# Altium PCB Ravage.PcbDoc
Units mm, origin at the board's own origin, x right, y up, seen from the top; angles counter-clockwise.
Board outline 99.5 x 79.8 mm, 4 copper layers (Top Layer, Internal Plane 1, Internal Plane 2, Bottom Layer); 1 components, 0 nets, 50 pads, 0 vias.
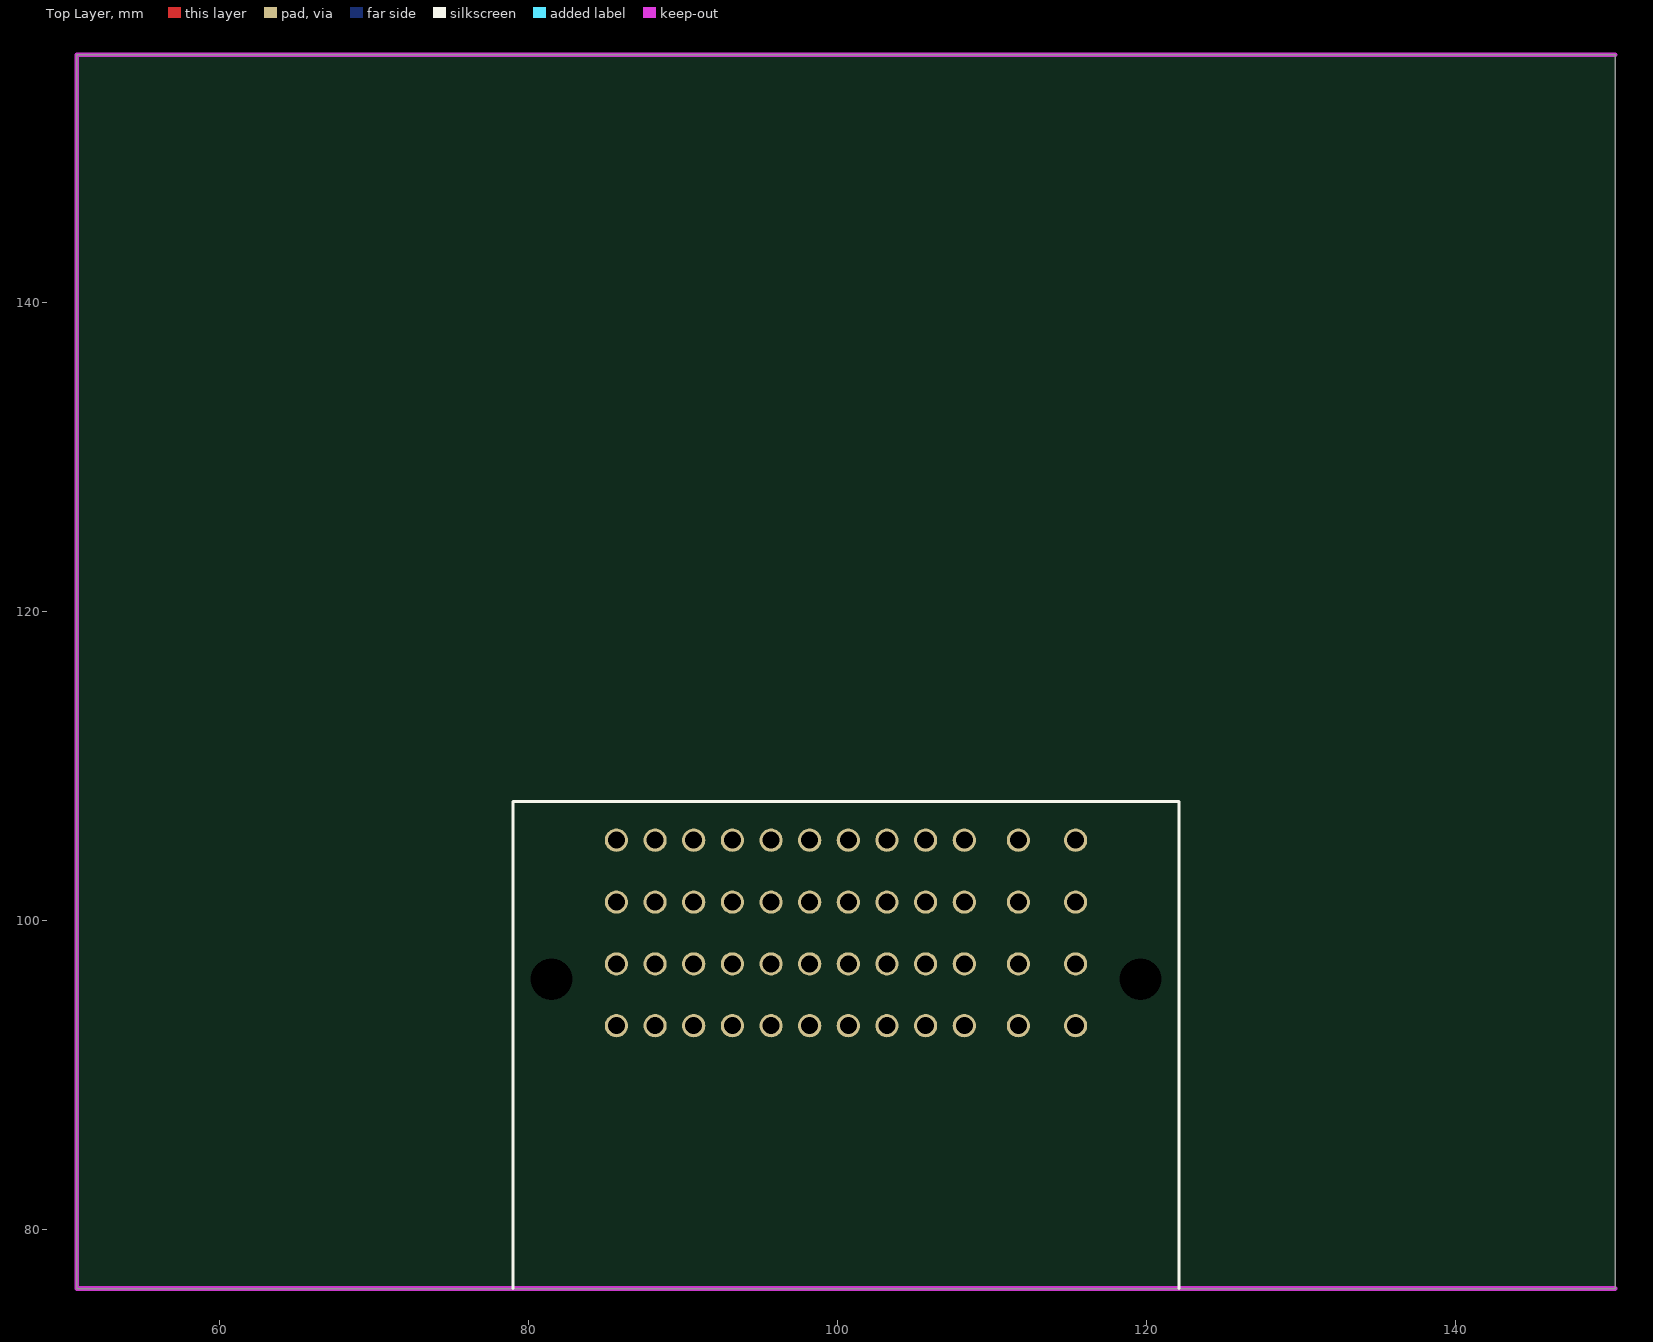
[diagram p0: Top Layer view]
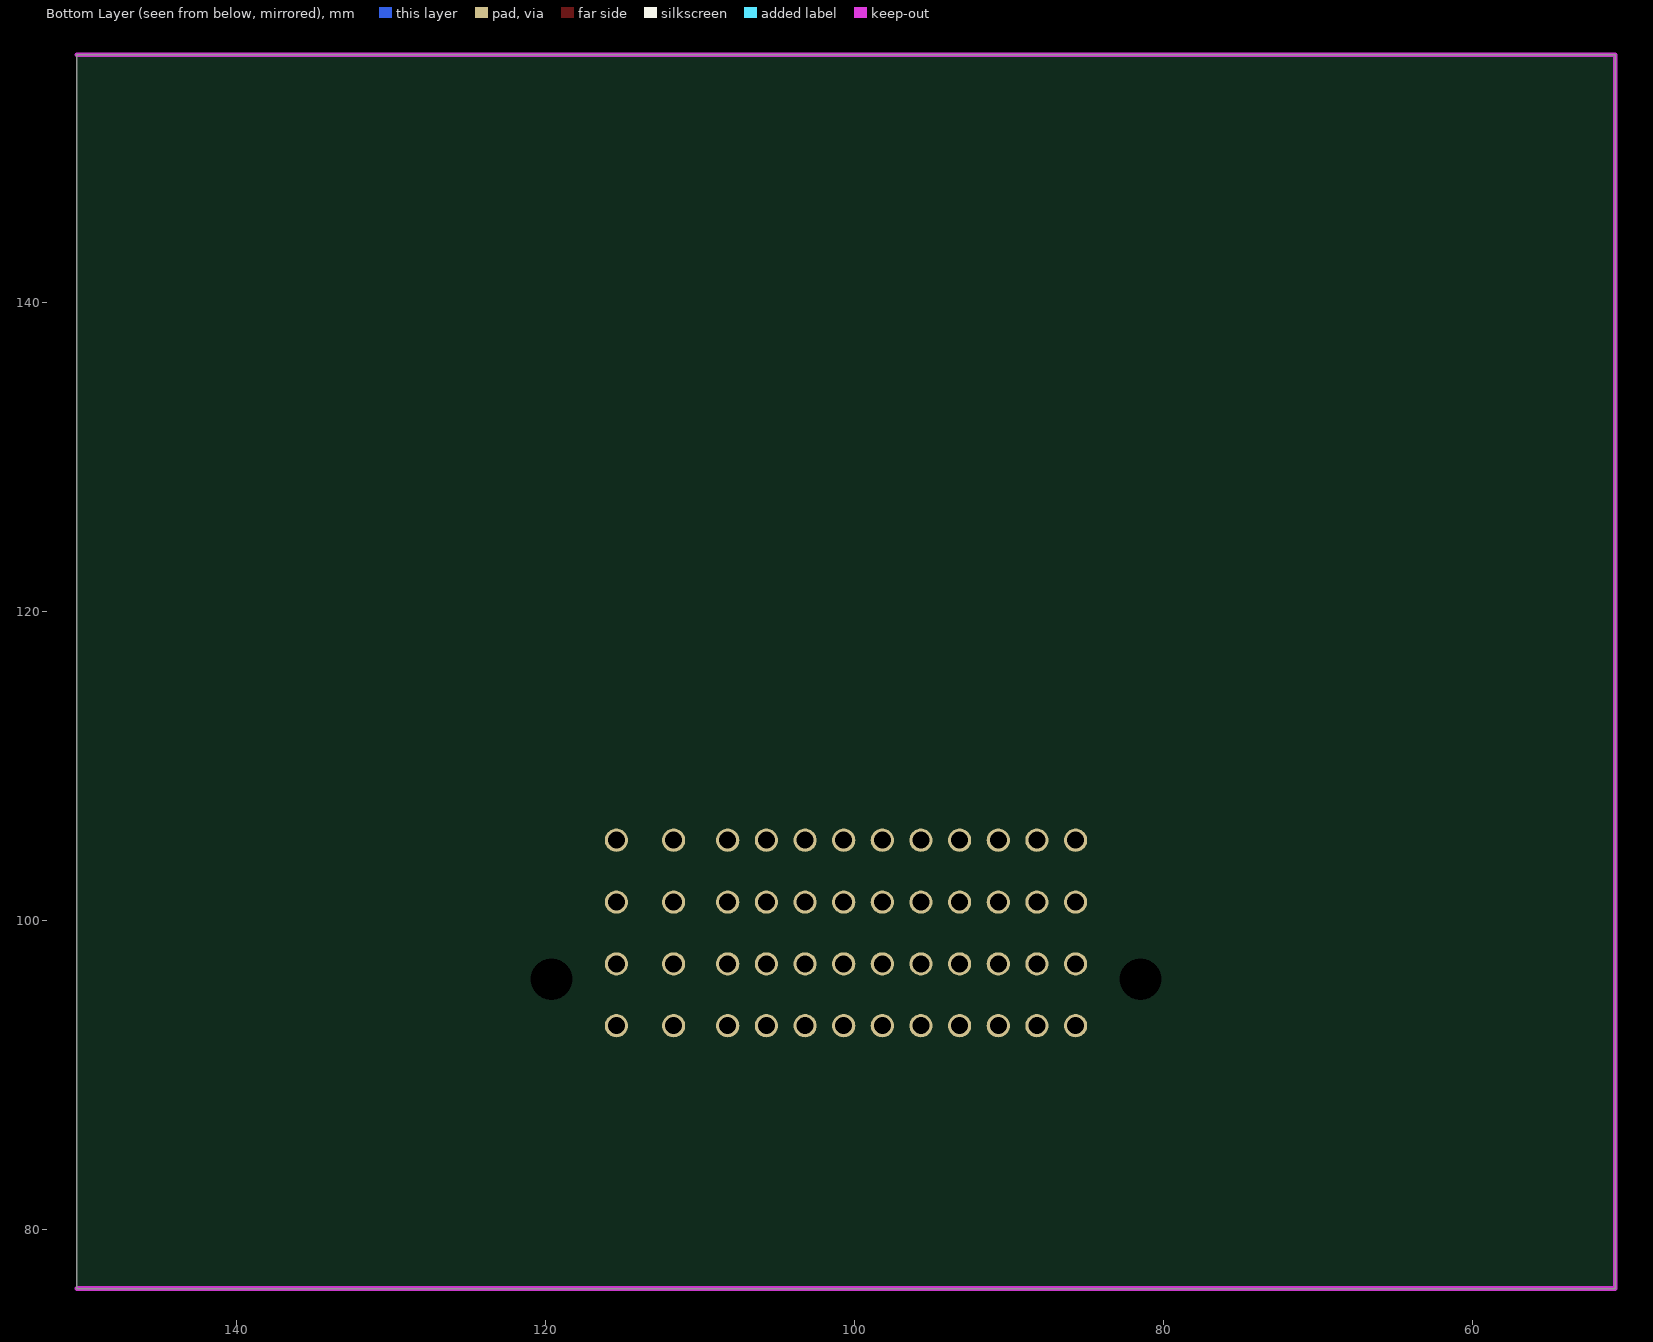
[diagram p1: Bottom Layer view, seen from below]
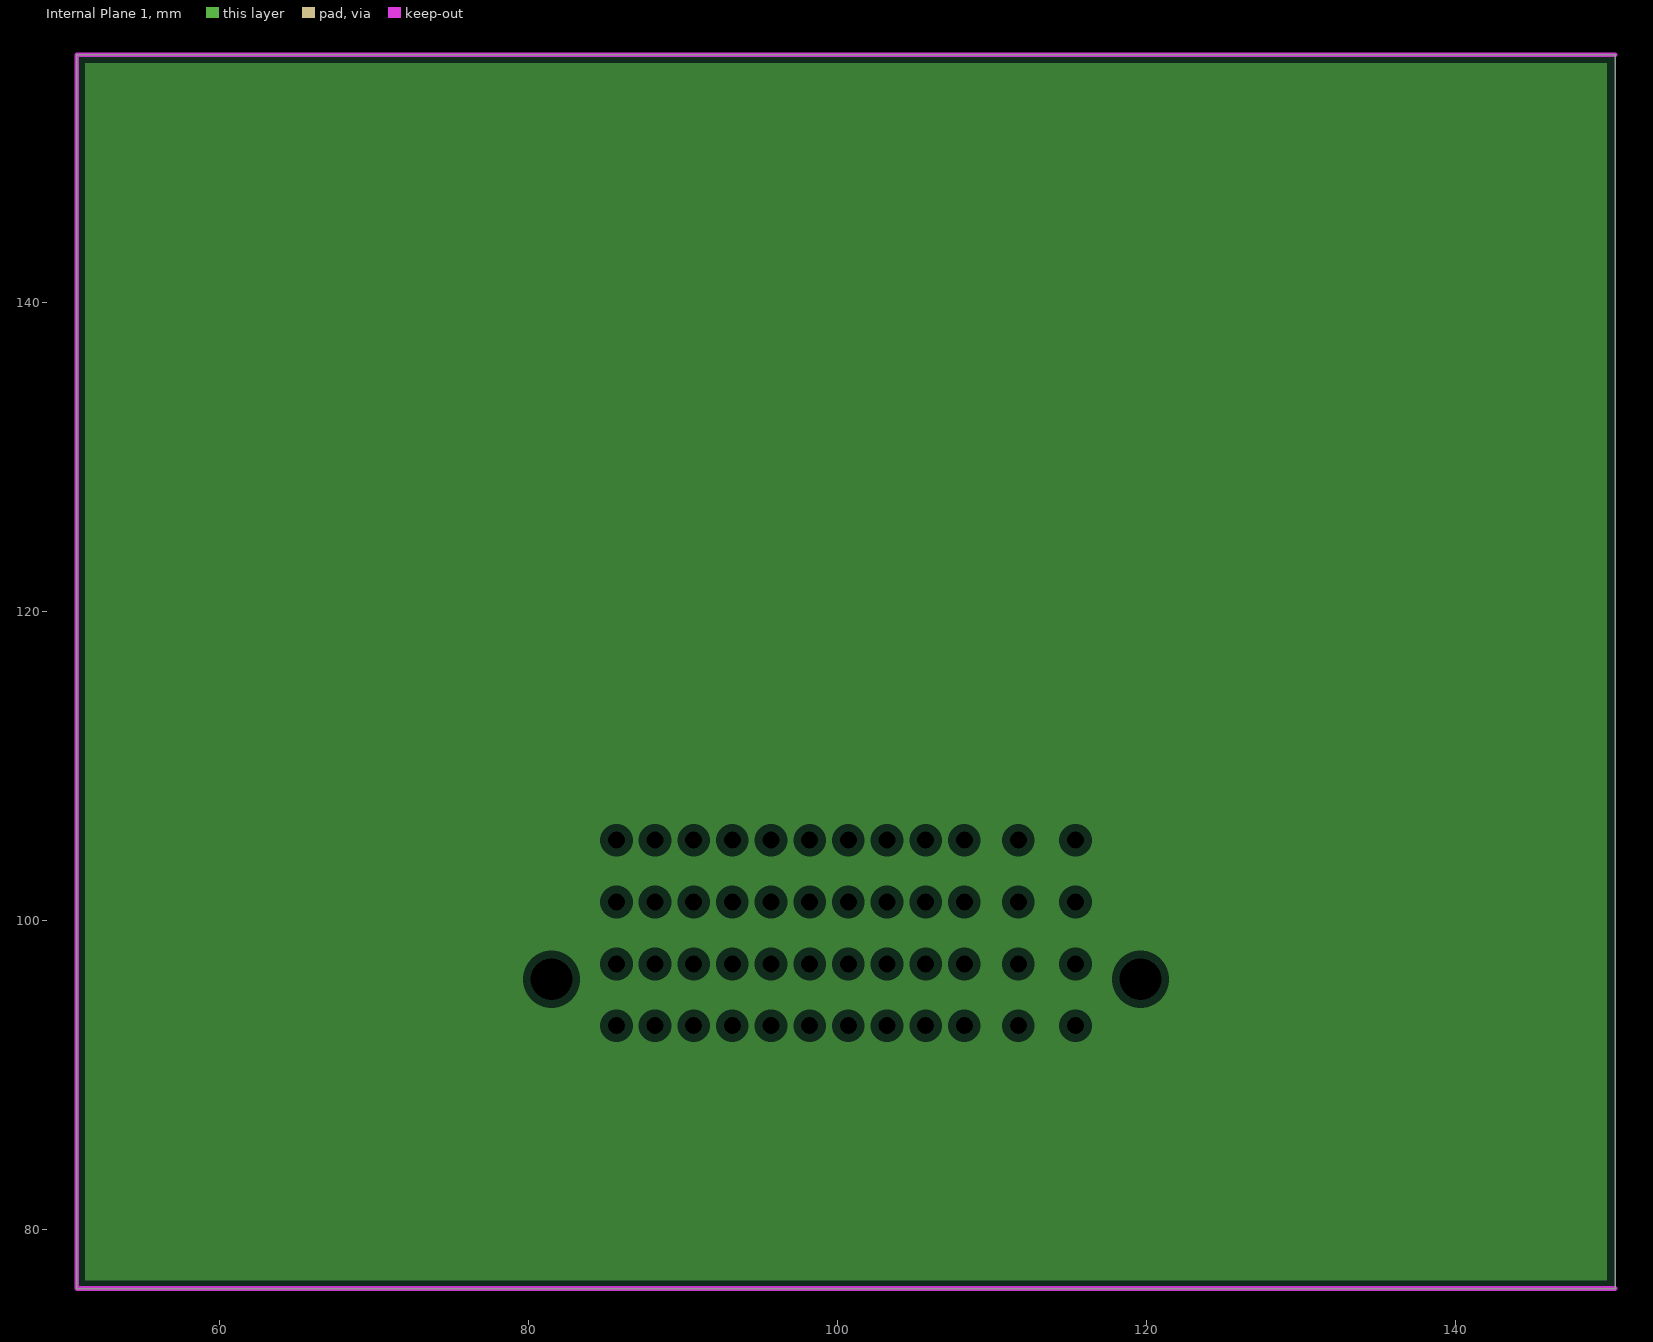
[diagram p2: Internal Plane 1, clearances drawn from the general rule]
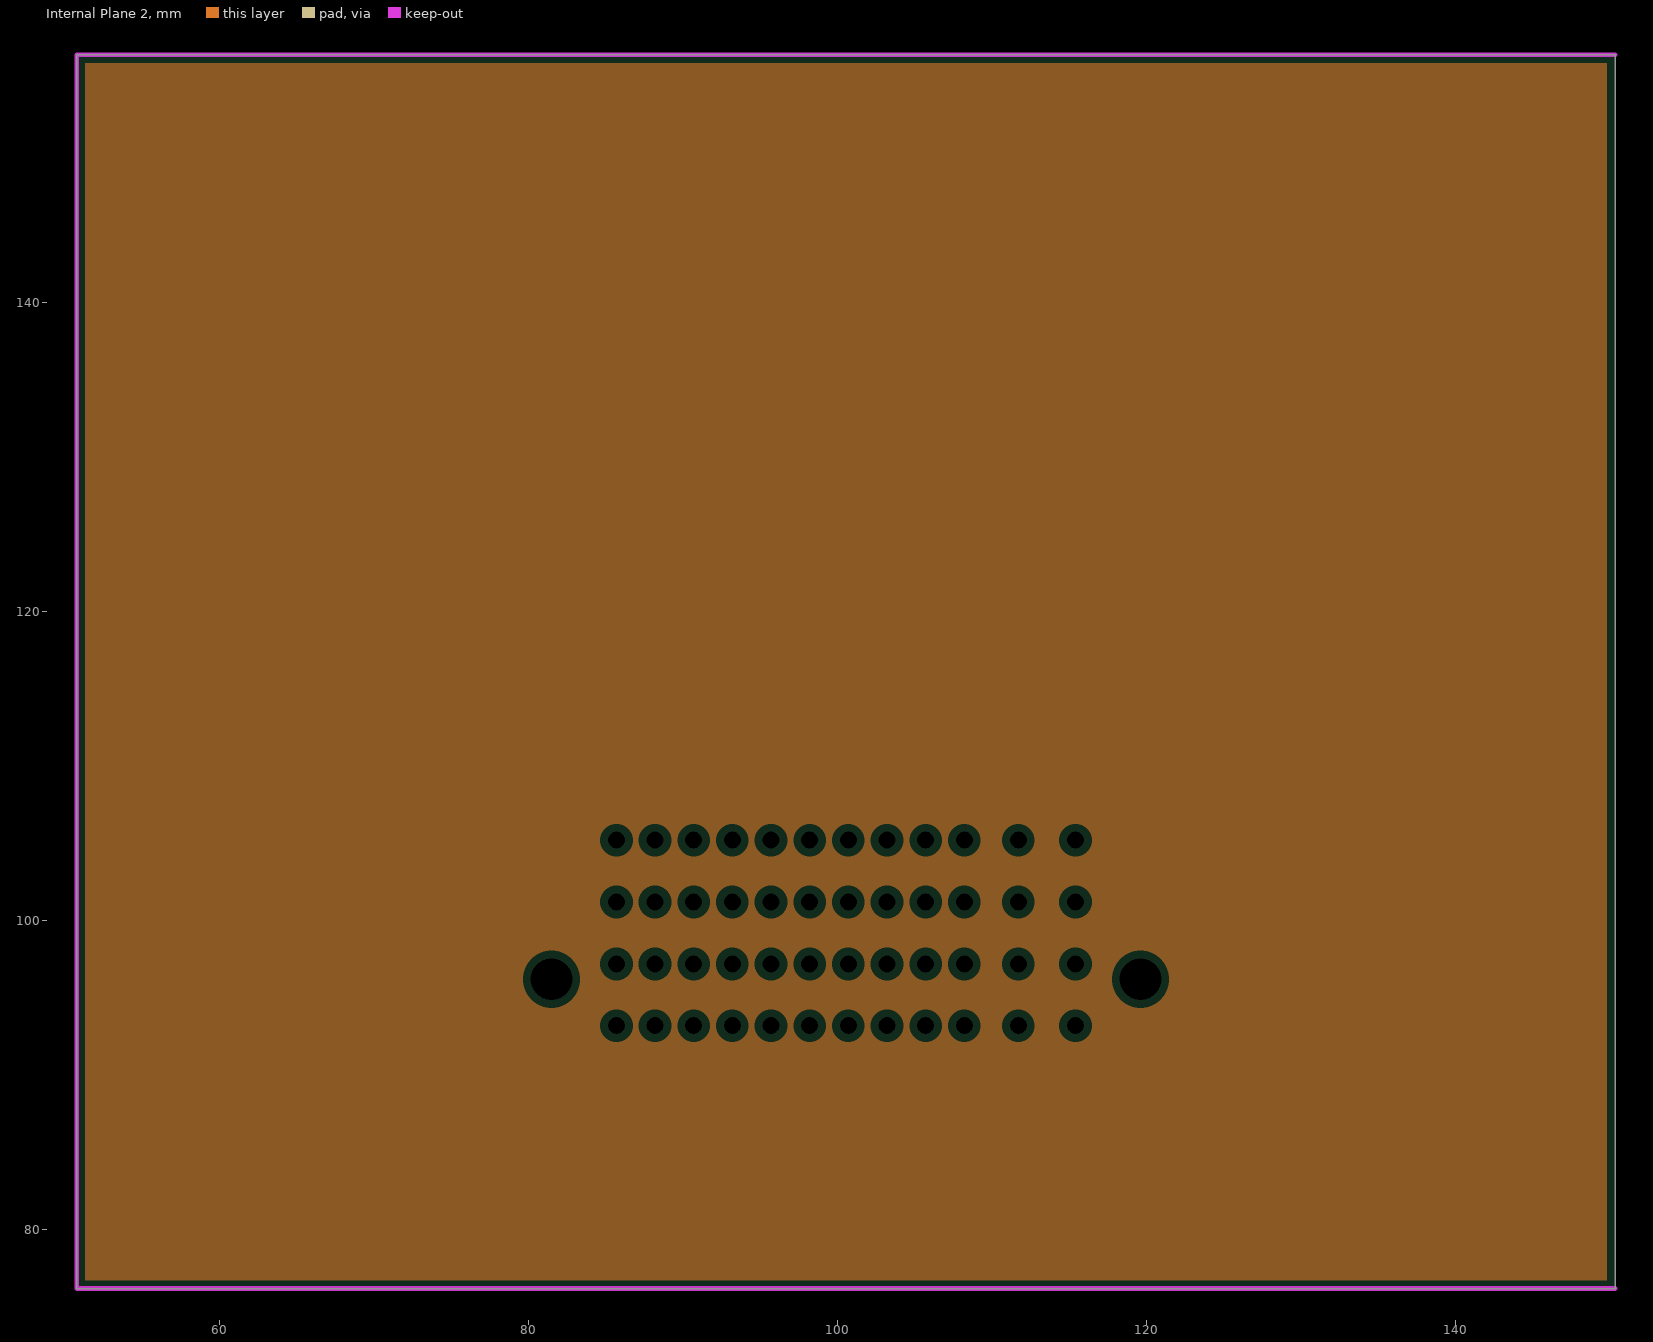
[diagram p3: Internal Plane 2, clearances drawn from the general rule]

## Layer stack, top to bottom
Top Layer: signal copper 0.0356
Dielectric: dielectric 0.32, FR-4, Dk 4.8
Internal Plane 1: plane copper 0.0356
Dielectric: dielectric 0.32, FR-4, Dk 4.8
Internal Plane 2: plane copper 0.0356
Dielectric: dielectric 0.32, FR-4, Dk 4.8
Bottom Layer: signal copper 0.0356

## Board outline
50.8,76.2 150.3,76.2 150.3,156 50.8,156

## Design rules (kind name [scope] priority, off if disabled: settings)
Clearance [All] p1: gap=0.2
PlaneClearance [All] p1: clearance=0.508
PlaneConnect [All] p1: planeconnectstyle=Relief reliefexpansion=0.508 reliefentries=4 reliefconductorwidth=0.254 reliefairgap=0.254
PolygonConnect [All] p1: connectstyle=Relief reliefconductorwidth=0.254 reliefentries=4 polygonreliefangle="90 Angle" airgapwidth=0.254
RoutingVias [All] p1: holewidth=0.6 width=1 viastyle="Through Hole" minholewidth=0.711 minwidth=1.27 maxholewidth=0.711 maxwidth=1.27
SilkscreenOverComponentPads [All] p1: minsilkscreentomaskgap=0.254
SolderMaskExpansion [All] p1: expansion=0.102
Width [All] p1: maxlimit=0.2 minlimit=0.2 preferedwidth=0.2
25 further rules are at their usual default settings.

## Components (designator, comment, footprint, x,y, rotation, side; value= is the part's Value field where it differs from the comment)
? "Comment" MOLEX0366380002 119.6,96.2 r180 top

## Footprints (in the part's own frame and the unit in brackets; to place one, negate y for a bottom-side part, rotate by r counter-clockwise, add the part's x,y. Pads: shape width x height; smd on the part's side, far side on the other; paste and mask are expansions set on the pad)
MOLEX0366380002 [mm]
  round 1.5 hole 1.1: A1(4.2,3) A2(4.2,-1) A3(4.2,-5) A4(4.2,-9) B1(7.9,3) B2(7.9,-1) B3(7.9,-5) B4(7.9,-9) C1(11.4,3) C2(11.4,-1) C3(11.4,-5) C4(11.4,-9) D1(13.9,3) D2(13.9,-1) D3(13.9,-5) D4(13.9,-9) E1(16.4,3) E2(16.4,-1) E3(16.4,-5) E4(16.4,-9) F1(18.9,3) F2(18.9,-1) F3(18.9,-5) F4(18.9,-9) G1(21.4,3) G2(21.4,-1) G3(21.4,-5) G4(21.4,-9) H1(23.9,3) H2(23.9,-1) H3(23.9,-5) H4(23.9,-9) J1(26.4,3) J2(26.4,-1) J3(26.4,-5) J4(26.4,-9) K1(28.9,3) K2(28.9,-1) K3(28.9,-5) K4(28.9,-9) L1(31.4,3) L2(31.4,-1) L3(31.4,-5) L4(31.4,-9) M1(33.9,3) M2(33.9,-1) M3(33.9,-5) M4(33.9,-9)
  round 2 hole 2.7: GND(0,0) GND(38.1,0)
  silkscreen extent -2.5,-11.5 40.6,20, body extent -10.22,-11.95 48.28,44.27, height 28.73

## Part data
?: library part Molex48

## Nets (pads, with @x,y where several pads share a name; then routed paths per layer and width w, separated by ;. In a path a pad name is that pad's centre, name@x,y a point inside that pad or via, vN(x,y) a via of type N, cw(c..) or ccw(c..) an arc to the next point about the centre after c; other vN are vias at no path point)
pads on no net: ?.A1 ?.A2 ?.A3 ?.A4 ?.B1 ?.B2 ?.B3 ?.B4 ?.C1 ?.C2 ?.C3 ?.C4 ?.D1 ?.D2 ?.D3 ?.D4 ?.E1 ?.E2 ?.E3 ?.E4 ?.F1 ?.F2 ?.F3 ?.F4 ?.G1 ?.G2 ?.G3 ?.G4 ?.GND ?.H1 ?.H2 ?.H3 ?.H4 ?.J1 ?.J2 ?.J3 ?.J4 ?.K1 ?.K2 ?.K3 ?.K4 ?.L1 ?.L2 ?.L3 ?.L4 ?.M1 ?.M2 ?.M3 ?.M4

## Polygon pours and split planes (outlines as drawn)
no net on Internal Plane 1 (split plane): 149.79,76.71 51.31,76.71 51.31,155.49 149.79,155.49
no net on Internal Plane 2 (split plane): 149.79,76.71 51.31,76.71 51.31,155.49 149.79,155.49

## Keep-outs
Keep-Out Layer:
  lines w0.3: 150.3,76.2 50.8,76.2 50.8,156 150.3,156

## Dimensions
50.8,76.2 to 50.8,156 on Mechanical 1
50.8,76.2 to 150.3,76.2 on Mechanical 1

## Text inside footprints (layer, text, board x,y; h text height)
?: Mechanical 13 "MIN PCB EDGE" at 109.1,72.7 h1.5 r180